# EAGLE board a30eee2cad2c9bf698126cb1c813ad28 (EAGLE 7.1.0)
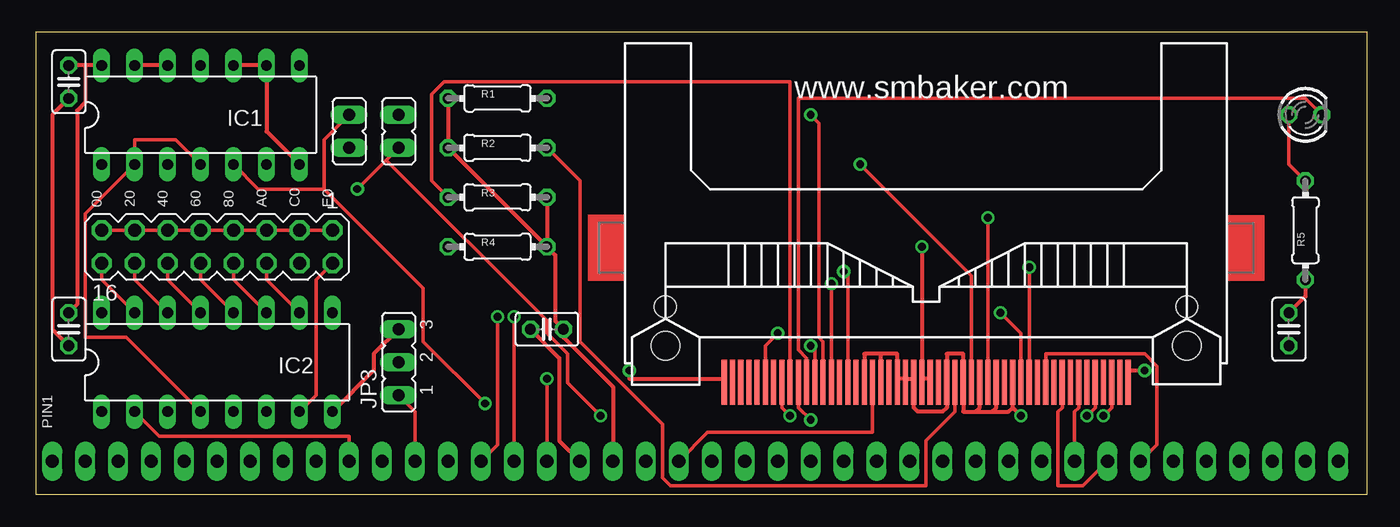
[diagram p0: board, top side]
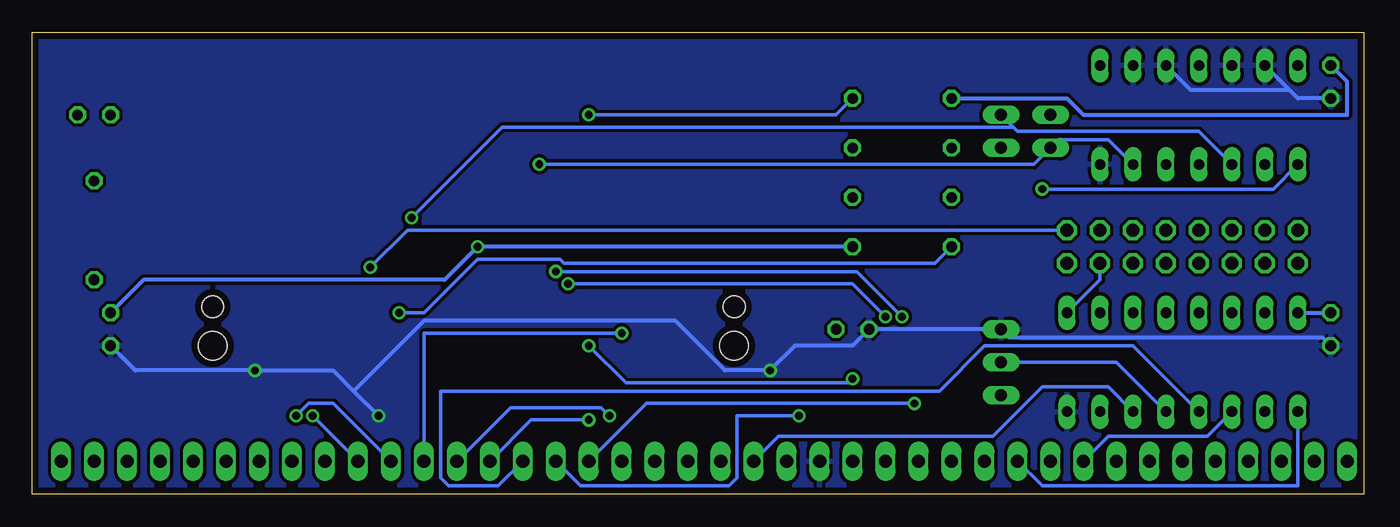
[diagram p1: board, bottom side, seen from below]

Size 102.54 x 35.55 mm. Coordinates in mm from the lower left corner, seen from the top.
Outline: 0,0 102.54,0 102.54,35.55 0,35.55 0,0
Copper layers (1*16): Top 0.035mm / dielectric 1.5mm / Bottom 0.035mm
Design rules "default *": minimum track width 10mil, minimum drill 24mil, track to track 10mil, track to pad 10mil, pad to pad 10mil, via to via 10mil, smd to smd 8mil, copper to edge 20mil, drill to drill 8mil, minimum pad ring 10mil, minimum via ring 8mil, stop-mask expansion 4mil, vias tented up to drill 25mil, thermal gap 10mil
Net classes: 1 PWR: width 0.305 mm

## Footprints (pad centres in the part's own frame; a part is rotated, then mirrored left to right if it is on the bottom)
C025-025X050 = drill 0.813 octagon: 1 -1.27,0; 2 1.27,0
N7E50-X516XX-20 = smd 0.4 x 3.5: 1 -15.557,2.81; 2 -14.287,2.81; 3 -13.018,2.81; 4 -11.748,2.81; 5 -10.477,2.81; 6 -9.207,2.81; 7 -7.938,2.81; 8 -6.668,2.81; 9 -5.397,2.81; 10 -4.128,2.81; 11 -2.857,2.81; 12 -1.587,2.81; 13 -0.318,2.81; 14 0.953,2.81; 15 2.223,2.81; 16 3.493,2.81; 17 4.763,2.81; 18 6.032,2.81; 19 7.303,2.81; 20 8.572,2.81; 21 9.842,2.81; 22 11.113,2.81; 23 12.383,2.81; 24 13.652,2.81; 25 14.922,2.81; 26 -14.922,2.81; 27 -13.652,2.81; 28 -12.383,2.81; 29 -11.113,2.81; 30 -9.842,2.81; 31 -8.572,2.81; 32 -7.303,2.81; 33 -6.032,2.81; 34 -4.763,2.81; 35 -3.493,2.81; 36 -2.223,2.81; 37 -0.953,2.81; 38 0.318,2.81; 39 1.587,2.81; 40 2.857,2.81; 41 4.128,2.81; 42 5.397,2.81; 43 6.668,2.81; 44 7.938,2.81; 45 9.207,2.81; 46 10.477,2.81; 47 11.748,2.81; 48 13.018,2.81; 49 14.287,2.81; 50 15.557,2.81 | hole 1.7: -20.08,-3; 20.08,-3 | hole 2.2: -20.08,0; 20.08,0
DIL14 = drill 0.813 long: 1 -7.62,-3.81; 2 -5.08,-3.81; 3 -2.54,-3.81; 4 0,-3.81; 5 2.54,-3.81; 6 5.08,-3.81; 7 7.62,-3.81; 8 7.62,3.81; 9 5.08,3.81; 10 2.54,3.81; 11 0,3.81; 12 -2.54,3.81; 13 -5.08,3.81; 14 -7.62,3.81
DIL16 = drill 0.813 long: 1 -8.89,-3.81; 2 -6.35,-3.81; 3 -3.81,-3.81; 4 -1.27,-3.81; 5 1.27,-3.81; 6 3.81,-3.81; 7 6.35,-3.81; 8 8.89,-3.81; 9 8.89,3.81; 10 6.35,3.81; 11 3.81,3.81; 12 1.27,3.81; 13 -1.27,3.81; 14 -3.81,3.81; 15 -6.35,3.81; 16 -8.89,3.81
JP1 = drill 0.914 long: 1 0,-1.27; 2 0,1.27
JP2 = drill 0.914 long: 1 -2.54,0; 2 0,0; 3 2.54,0
LED3MM = drill 0.813 octagon: A -1.27,0; K 1.27,0
0204/7 = drill 0.813 octagon: 1 -3.81,0; 2 3.81,0
MA08-2 = drill 1.016 octagon: 1 -8.89,-1.27; 2 -8.89,1.27; 3 -6.35,-1.27; 4 -6.35,1.27; 5 -3.81,-1.27; 6 -3.81,1.27; 7 -1.27,-1.27; 8 -1.27,1.27; 9 1.27,-1.27; 10 1.27,1.27; 11 3.81,-1.27; 12 3.81,1.27; 13 6.35,-1.27; 14 6.35,1.27; 15 8.89,-1.27; 16 8.89,1.27
SIP40 = drill 1.016 long: 1 -48.26,0; 2 -45.72,0; 3 -43.18,0; 4 -40.64,0; 5 -38.1,0; 6 -35.56,0; 7 -33.02,0; 8 -30.48,0; 9 -27.94,0; 10 -25.4,0; 11 -22.86,0; 12 -20.32,0; 13 -17.78,0; 14 -15.24,0; 15 -12.7,0; 16 -10.16,0; 17 -7.62,0; 18 -5.08,0; 19 -2.54,0; 20 0,0; 21 2.54,0; 22 5.08,0; 23 7.62,0; 24 10.16,0; 25 12.7,0; 26 15.24,0; 27 17.78,0; 28 20.32,0; 29 22.86,0; 30 25.4,0; 31 27.94,0; 32 30.48,0; 33 33.02,0; 34 35.56,0; 35 38.1,0; 36 40.64,0; 37 43.18,0; 38 45.72,0; 39 48.26,0; 40 50.8,0

## Placement (x,y rotation side)
C1  [C025-025X050]  39.37,12.7 180 top
C2  [C025-025X050]  2.54,12.7 270 top
C3  [C025-025X050]  2.54,31.75 270 top
C4  [C025-025X050]  96.52,12.7 270 top
CON2  [N7E50-X516XX-20]  68.58,11.43 180 top
IC1  74LS32N  [DIL14]  12.7,29.21 0 top
IC2  74HCT138N  [DIL16]  13.97,10.16 0 top
JP1  [JP1]  27.94,27.94 0 top
JP2  [JP1]  24.13,27.94 0 top
JP3  [JP2]  27.94,10.16 90 top
LED1  [LED3MM]  97.79,29.21 0 top
R1  1K  [0204/7]  35.56,30.48 0 top
R2  1K  [0204/7]  35.56,26.67 0 top
R3  1K  [0204/7]  35.56,22.86 0 top
R4  1K  [0204/7]  35.56,19.05 180 top
R5  680  [0204/7]  97.79,20.32 270 top
SV2  [MA08-2]  13.97,19.05 180 top
U$1  RC2014  [SIP40]  49.53,2.54 0 top

## Library data of the parts
C1-C4 R1-R5 = resistor
CON2 U$1 = scott
IC1 = 74xx-us
IC2 = 74xx-eu
JP1-JP3 = jumper
LED1 = led
SV2 = con-lstb; OC_FARNELL: unknown; OC_NEWARK: unknown

## Nets
+5V [PWR]: C1.1 C2.1 C3.1 C4.1 CON2.13 CON2.38 IC1.14 IC2.16 R1.1 R2.1 R3.2 R4.1 R5.2 U$1.18
A0: CON2.20 U$1.16
A1: CON2.19 U$1.15
A2: CON2.18 U$1.14
A4: JP3.1 U$1.12
A5: IC2.1 U$1.11
A6: IC2.2 U$1.10
A7: IC2.3 U$1.9
D0: CON2.21 U$1.27
D1: CON2.22 U$1.28
D2: CON2.23 U$1.29
D3: CON2.2 U$1.30
D4: CON2.3 U$1.31
D5: CON2.4 U$1.32
D6: CON2.5 U$1.33
D7: CON2.6 U$1.34
GND [PWR]: C1.2 C2.2 C3.2 C4.2 CON2.1 CON2.8 CON2.9 CON2.10 CON2.11 CON2.12 CON2.14 CON2.15 CON2.16 CON2.17 CON2.39 CON2.50 IC1.7 IC1.9 IC1.10 IC1.12 IC1.13 IC2.8 JP3.3 U$1.17
IORQ: IC1.2 IC1.4 IC2.4 U$1.26
M1: IC2.6 U$1.19
N$1: CON2.7 SV2.1 SV2.3 SV2.5 SV2.7 SV2.9 SV2.11 SV2.13 SV2.15
N$2: CON2.34 IC1.3 JP1.2
N$3: CON2.35 IC1.6 JP2.1
N$4: IC2.15 SV2.16
N$5: IC2.14 SV2.14
N$6: IC2.13 SV2.12
N$7: IC2.12 SV2.10
N$8: IC2.11 SV2.8
N$9: IC2.10 SV2.6
N$10: IC2.9 SV2.4
N$11: IC2.7 SV2.2
N$12: CON2.45 LED1.K
N$13: CON2.36 R2.2
N$14: CON2.44 R1.2
N$15: LED1.A R5.1
N$16: CON2.32 R4.2
N$17: IC2.5 JP3.2
N$19: CON2.46 R3.1
RD: IC1.1 JP1.1 U$1.25
RESET: CON2.41 U$1.20
WR: IC1.5 JP2.2 U$1.24

## Tracks (layer width: path | path; a pad name or v marks a point on that pad's centre or on a via)
+5V  (via drill 0.61)
  Top 0.305: IC1.14 3.81,33.02 | 3.81,33.02 C3.1 | C2.1 3.17,14.61 3.17,29.53 3.81,30.16 3.81,33.02 | C4.1 97.79,15.24 R5.2 | R1.1 R2.1 R4.1 | 68.26,8.89 68.9,8.89 CON2.13 | R3.2 R4.1 | R4.1 40.01,18.41 40.01,13.34 C1.1 40.64,12.06 44.45,8.26 U$1.18 | v68.26,19.05 68.26,8.89 | 68.26,8.89 CON2.38
  Bottom 0.305: IC2.16 C2.1 | R4.1 v68.26,19.05 70.8,16.51 93.98,16.51 C4.1 | C3.1 1.27,31.75 1.27,29.21 21.59,29.21 22.86,30.48 R1.1
A0  (via drill 0.61)
  Top 0.254: v39.37,8.89 U$1.16 | v59.69,11.43 60.01,11.11 CON2.20
  Bottom 0.254: v39.37,8.89 39.69,8.57 56.83,8.57 v59.69,11.43
A1  (via drill 0.61)
  Top 0.254: v36.83,13.65 U$1.15 | CON2.19 v61.28,16.19
  Bottom 0.254: v36.83,13.65 39.37,16.19 v61.28,16.19
A2  (via drill 0.61)
  Top 0.254: U$1.14 35.56,3.81 v35.56,13.65 | v62.23,17.14 62.55,16.83 CON2.18
  Bottom 0.254: v35.56,13.65 39.05,17.14 v62.23,17.14
A4
  Top 0.254: JP3.1 29.21,6.35 U$1.12
A5
  Bottom 0.254: IC2.1 5.08,0.64 24.77,0.64 U$1.11
A6
  Top 0.254: IC2.2 9.53,4.45 24.13,4.45 U$1.10
A7
  Bottom 0.254: IC2.3 12.06,4.45 19.68,4.45 U$1.9
D0  (via drill 0.61)
  Top 0.254: v59.69,5.71 58.74,6.67 CON2.21
  Bottom 0.254: U$1.27 64.14,5.71 v59.69,5.71
D1  (via drill 0.61)
  Top 0.254: v58.1,6.03 57.47,6.67 CON2.22
  Bottom 0.254: U$1.28 65.72,6.67 58.74,6.67 v58.1,6.03
D2  (via drill 0.61)
  Top 0.254: v57.15,12.38 56.2,11.43 CON2.23
  Bottom 0.254: U$1.29 72.39,12.38 v57.15,12.38
D3  (via drill 0.61)
  Top 0.254: v82.23,6.03 82.87,6.67 CON2.2
  Bottom 0.254: U$1.30 79.38,6.99 81.28,6.99 v82.23,6.03
D4  (via drill 0.61)
  Top 0.254: v80.96,6.03 81.6,6.67 CON2.3
  Bottom 0.254: v80.96,6.03 U$1.31
D5
  Top 0.254: U$1.32 80.01,6.35 80.33,6.67 CON2.4
D6
  Top 0.254: U$1.33 80.64,0.64 78.74,0.64 78.74,6.35 79.06,6.67 CON2.5
D7
  Top 0.254: U$1.34 86.36,3.81 86.36,9.84 85.41,10.79 77.79,10.79 CON2.6
GND  (via drill 0.61)
  Top 0.305: IC1.10 IC1.9 17.78,27.94 IC1.7 | IC1.12 IC1.13 | C2.2 1.27,12.7 1.27,29.21 C3.2 | CON2.17 63.82,10.79 65.09,10.79 | CON2.16 65.09,10.79 | 66.99,8.89 66.36,8.89 | 66.99,8.89 67.63,8.89 CON2.14 67.63,6.67 67.94,6.35 69.85,6.35 70.17,6.67 CON2.12 70.17,10.79 71.44,10.79 CON2.11 71.44,6.35 72.39,6.35 | 66.99,8.89 CON2.39 | 65.09,10.79 66.36,10.79 66.36,8.89 | 66.36,8.89 CON2.15 | CON2.10 72.71,6.67 72.39,6.35 | CON2.9 73.98,6.67 73.66,6.35 | 72.39,6.35 73.66,6.35 | 75.25,6.67 CON2.8 | 75.25,6.67 74.93,6.35 73.66,6.35 | v85.41,9.53 84.14,9.53 CON2.1 | v75.88,6.03 75.25,6.67 | IC2.8 26.04,9.53 26.04,10.79 JP3.3 | U$1.17 40.32,4.13 40.32,10.48 C1.2 | v45.72,9.53 45.72,8.89 53.02,8.89 CON2.50
  Bottom 0.305: 5.71,31.11 5.08,30.48 C3.2 | 5.71,31.11 IC1.13 | IC1.10 13.34,31.11 5.71,31.11 | C4.2 94.61,9.53 v85.41,9.53 79.38,9.53 77.79,7.94 | 77.79,7.94 v75.88,6.03 | 77.79,7.94 72.39,13.34 53.02,13.34 49.21,9.53 v45.72,9.53 43.81,11.43 39.37,11.43 C1.2 JP3.3 27.3,12.06 3.17,12.06 C2.2
  pour Bottom: 0,0 0,35.56 102.87,35.56 102.87,0
IORQ
  Top 0.254: IC2.4 6.99,12.06 3.81,12.06 3.81,21.59 IC1.2 7.62,27.3 10.79,27.3 IC1.4
  Bottom 0.254: U$1.26 66.67,0.64 70.48,0.64 71.12,1.27 71.12,7.94 32.7,7.94 29.21,11.43 17.78,11.43 IC2.4
M1
  Bottom 0.254: IC2.6 19.68,8.26 24.77,8.26 28.57,4.45 45.09,4.45 U$1.19
N$1  (via drill 0.61)
  Top 0.254: SV2.15 SV2.13 SV2.11 SV2.9 SV2.7 SV2.5 SV2.3 SV2.1 | v76.52,17.46 CON2.7
  Bottom 0.254: v76.52,17.46 73.66,20.32 SV2.1
N$2  (via drill 0.61)
  Top 0.254: v73.34,21.27 CON2.34
  Bottom 0.254: IC1.3 12.7,27.94 26.67,27.94 26.99,28.26 | JP1.2 26.99,28.26 | v73.34,21.27 66.36,28.26 26.99,28.26
N$3  (via drill 0.61)
  Top 0.254: CON2.35 72.07,16.83 v63.5,25.4
  Bottom 0.254: IC1.6 19.68,27.3 23.5,27.3 JP2.1 25.4,25.4 v63.5,25.4
N$4
  Top 0.254: IC2.15 5.08,16.51 SV2.16
N$5
  Top 0.254: IC2.14 7.62,16.51 SV2.14
N$6
  Top 0.254: IC2.13 10.16,16.51 SV2.12
N$7
  Top 0.254: IC2.12 12.7,16.51 SV2.10
N$8
  Top 0.254: IC2.11 15.24,16.51 SV2.8
N$9
  Top 0.254: IC2.10 17.78,16.51 SV2.6
N$10
  Bottom 0.254: IC2.9 20.32,16.51 SV2.4
N$11
  Top 0.254: IC2.7 21.59,7.62 21.59,16.51 SV2.2
N$12
  Top 0.254: LED1.K 97.79,30.48 58.74,30.48 58.74,11.11 59.37,10.48 CON2.45
N$13
  Top 0.254: R2.2 41.91,24.13 41.91,11.75 48.26,5.4 48.26,1.27 48.9,0.64 68.58,0.64 68.58,4.13 70.8,6.35 CON2.36
N$14  (via drill 0.61)
  Top 0.254: v59.69,29.21 60.33,28.57 60.33,12.06 60.64,11.75 CON2.44
  Bottom 0.254: R1.2 40.64,29.21 v59.69,29.21
N$15
  Top 0.254: R5.1 96.52,25.4 LED1.A
N$16  (via drill 0.61)
  Top 0.254: v74.3,13.97 75.88,12.38 CON2.32
  Bottom 0.254: R4.2 33.02,17.78 61.59,17.78 61.91,18.1 68.26,18.1 72.39,13.97 v74.3,13.97
N$17
  Bottom 0.254: IC2.5 19.05,10.16 JP3.2
N$19
  Top 0.254: R3.1 30.48,24.13 30.48,30.8 31.43,31.75 58.1,31.75 CON2.46
RD  (via drill 0.61)
  Top 0.254: JP1.1 26.99,25.72 | 26.99,25.72 v24.77,23.5 | v43.5,6.03 40.96,8.57 40.96,10.79 39.37,12.38 39.37,13.34 26.99,25.72
  Bottom 0.254: IC1.1 6.99,23.5 v24.77,23.5 | U$1.25 60.33,0.64 48.9,0.64 48.26,1.27 48.26,6.03 v43.5,6.03
RESET
  Top 0.254: U$1.20 51.75,4.76 64.45,4.76 CON2.41
WR  (via drill 0.61)
  Top 0.254: IC1.5 17.14,23.5 22.23,23.5 | 22.23,23.5 22.23,27.3 JP2.2 | v34.61,6.99 29.84,11.75 29.84,15.88 22.23,23.5
  Bottom 0.254: U$1.24 55.24,6.99 v34.61,6.99

## Text on the board
tPlace: www.smbaker.com | 00 | 20 | 40 | 60 | 80 | A0 | C0 | E0 | PIN1